# Altium PCB slave.PcbDoc (part 5 of 8)
Units mm, origin at the board's own origin, x right, y up, seen from the top; angles counter-clockwise.
Board outline 160 x 100 mm, 6 copper layers (Top, FUSED_VBAT-, Signals1, Signals2, SUPPLY, Bottom), stack 1.67 mm thick; 582 components, 375 nets, 1615 pads, 3043 vias.
Unrouted connection lines stored in the file: 1.
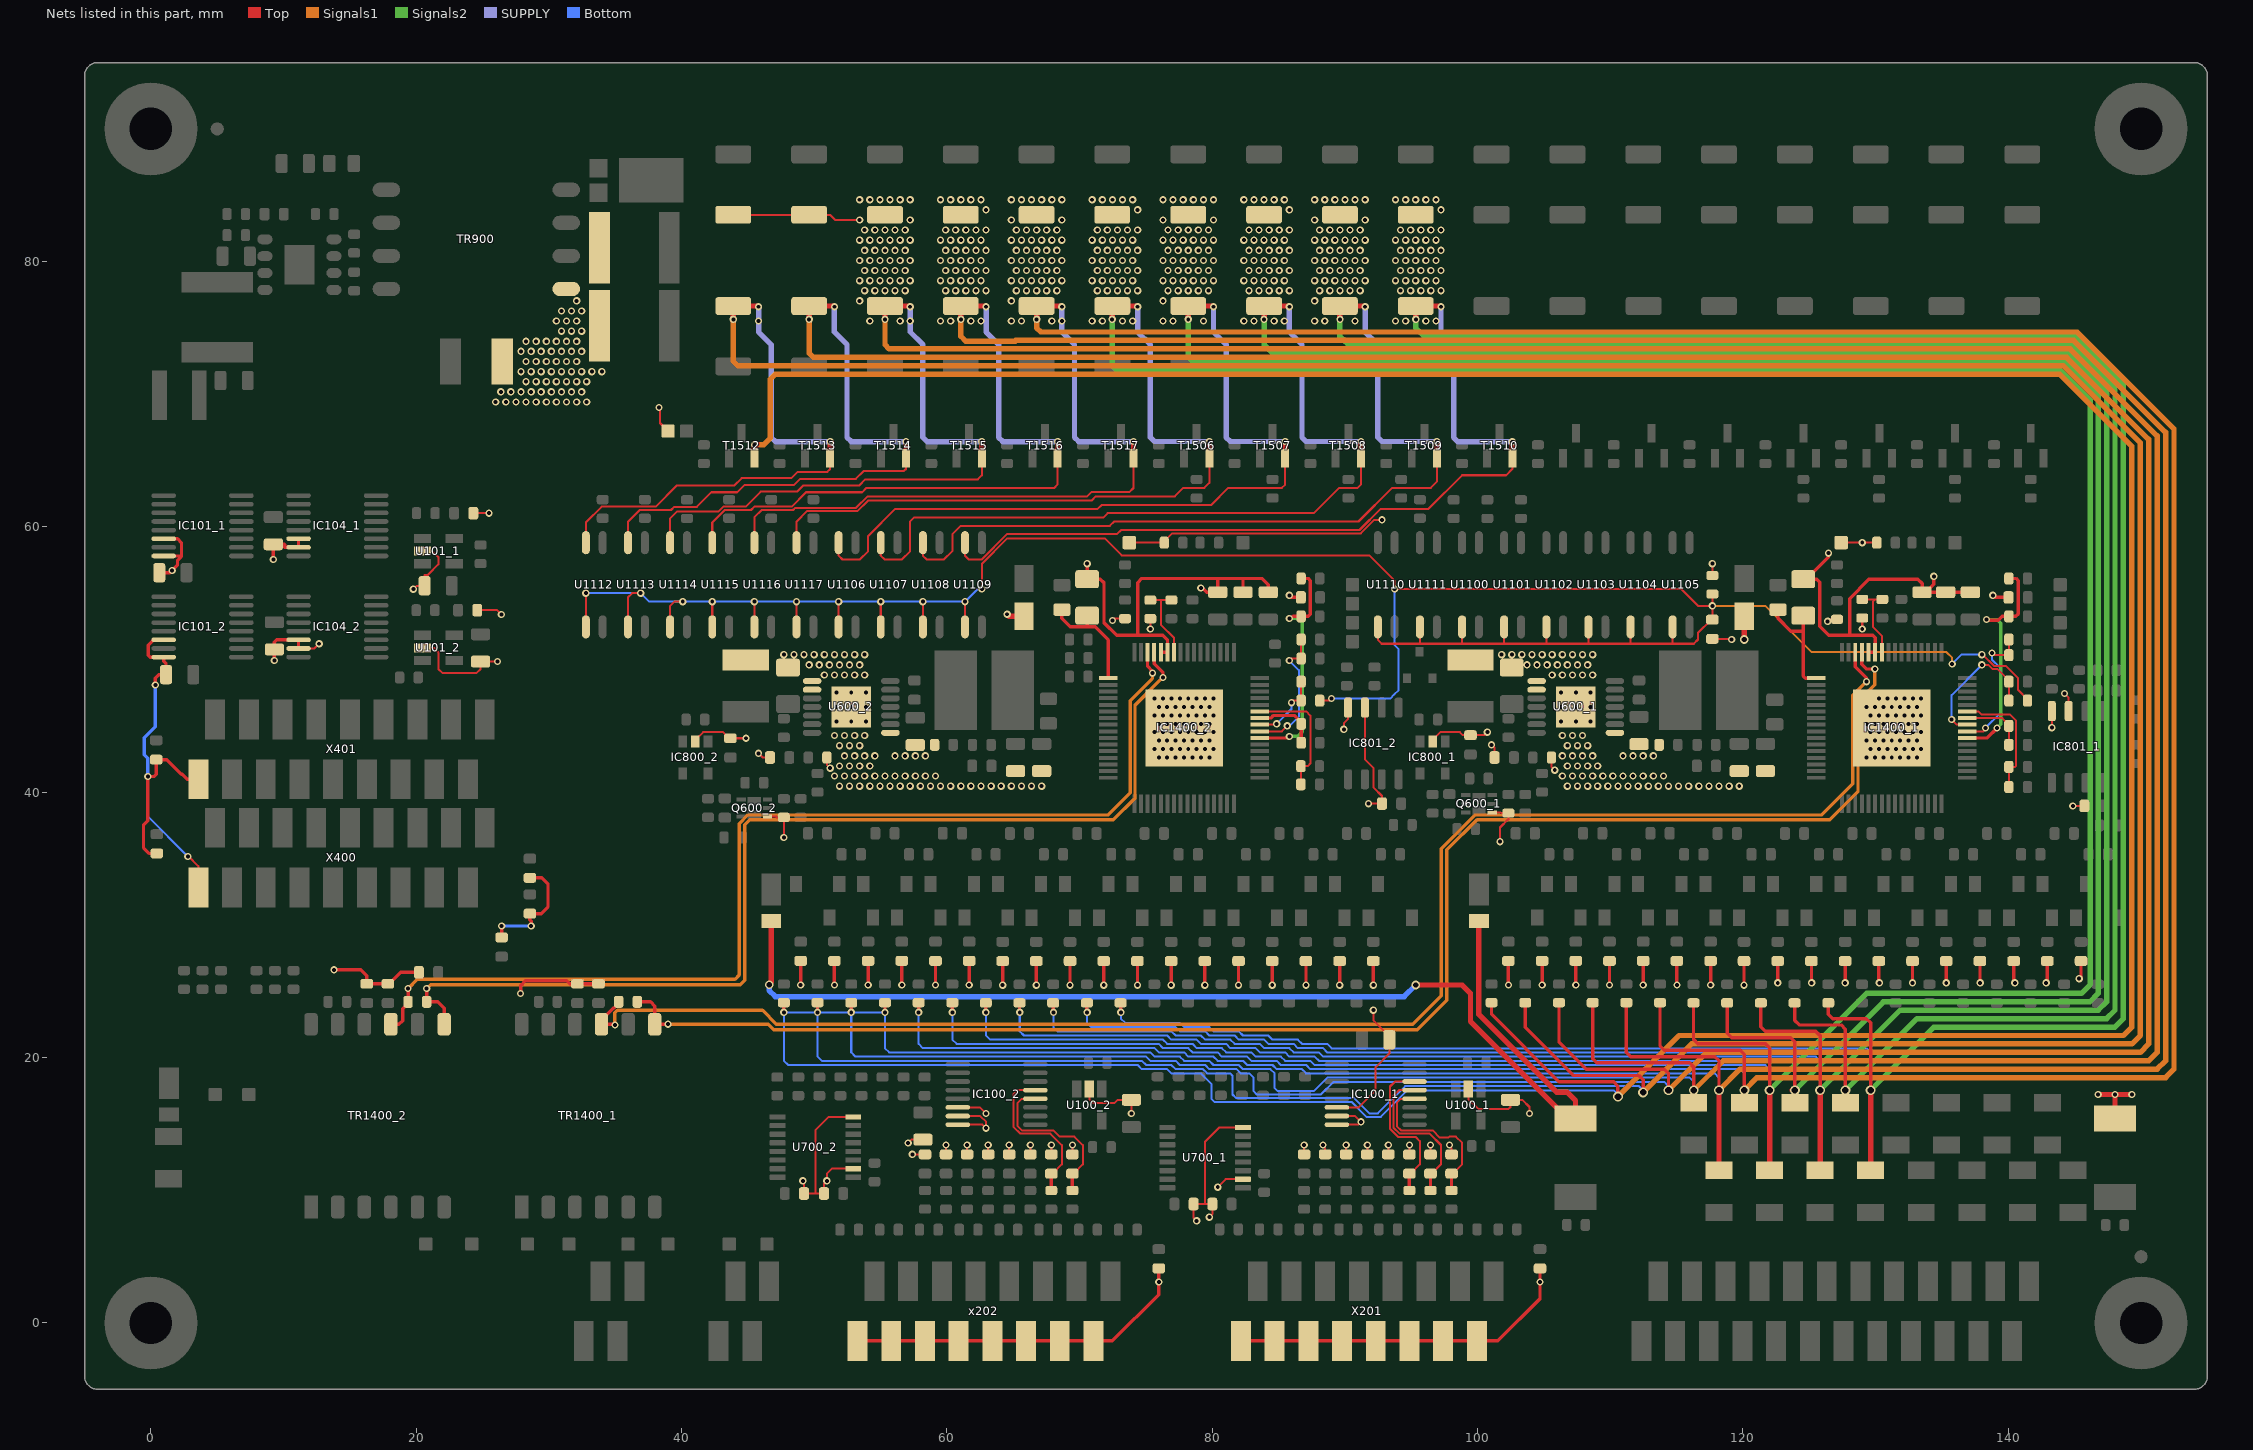
[diagram p8: the nets of this part, all layers, seen from the top]

## Via types
v1: diameter 0.55, hole 0.3, Top to Bottom, tented both sides, 2963 vias
v2: diameter 0.55, hole 0.3, Top to Bottom, 41 vias
v3: diameter 0.75, hole 0.5, Top to Bottom, tented both sides, 22 vias
v4: diameter 0.65, hole 0.4, Top to Bottom, tented both sides, 16 vias
v5: diameter 0.75, hole 0.5, Top to Bottom, 1 vias

## Nets (pads, with @x,y where several pads share a name; then routed paths per layer and width w, separated by ;. In a path a pad name is that pad's centre, name@x,y a point inside that pad or via, vN(x,y) a via of type N, cw(c..) or ccw(c..) an arc to the next point about the centre after c; other vN are vias at no path point) (continued)
FUSED_CELL.CELL_7+: F311.2 R1311_1.1 R1311_2.1 R1521.1 R1527.1 T1510.2 U1109.2 | length 266.8
  Top w0.152: U1109.2@61.363,58.81 61.363,57.833 61.657,57.54 62.614,57.54 64.519,59.445 72.811,59.445 73.129,59.762 91.098,59.762 92.685,61.35 96.301,61.35 98.841,63.89 102.145,63.89 102.616,64.361 T1510.2@102.616,65.162
  Top w0.254: R1311_2.1@73.091,24.125 73.091,23.428 v1(73.111,23.408) ; R1311_1.1@126.431,24.125 126.431,23.27 126.768,22.932 129.308,22.932 129.626,22.615 v3(129.626,17.535)
  Top w0.406: v1(95.341,75.637) 95.336,75.642 R1521.1@95.336,76.642 97.188,76.642 v1(97.241,76.59) ; T1510.2@102.616,65.162 v1(102.616,66.407) ; F311.2@129.626,11.505 v3(129.626,17.535)
  Signals2 w0.406: v1(95.341,75.637) 95.336,75.632 95.336,75.002 95.971,74.367 96.606,74.367 144.982,74.367 148.676,70.673 148.676,65.795 148.676,65.16 148.676,22.932 148.041,22.297 134.388,22.297 v3(129.626,17.535)
  SUPPLY w0.406: v1(97.241,76.59) 97.241,74.685 98.193,73.732 98.193,66.747 98.533,66.407 v1(102.616,66.407)
  Bottom w0.152: v1(73.111,23.408) 73.111,22.932 73.428,22.615 77.556,22.615 77.873,22.297 79.778,22.297 80.096,21.98 82.001,21.98 82.318,21.662 84.223,21.662 84.541,21.345 86.446,21.345 86.763,21.027 88.668,21.027 88.998,20.697 129.308,20.697 129.626,20.38 v3(129.626,17.535)
  other v1: 93.812,75.51 94.574,75.51 96.098,75.51 96.86,75.51 94.193,77.796 94.955,77.796 95.717,77.796 96.479,77.796 97.241,77.796 93.812,78.558 94.574,78.558 95.336,78.558 96.098,78.558 96.86,78.558 94.193,79.32 94.955,79.32 95.717,79.32 96.479,79.32 97.241,79.32 93.812,80.082 94.574,80.082 95.336,80.082 96.098,80.082 96.86,80.082 94.193,80.844 94.955,80.844 95.717,80.844 96.479,80.844 97.241,80.844 93.812,81.606 94.574,81.606 95.336,81.606 96.098,81.606 96.86,81.606 94.193,82.368 94.955,82.368 95.717,82.368 96.479,82.368 97.241,82.368 97.241,83.892 93.812,84.654 94.574,84.654 95.336,84.654 96.098,84.654 96.86,84.654
FUSED_CELL.CELL_8+: F310.2 R1310_1.1 R1310_2.1 R1520.1 R1526.1 T1509.2 U1108.2 | length 268
  Top w0.152: U1108.2@58.188,58.81 58.188,57.833 58.482,57.54 59.776,57.54 60.411,58.175 60.411,59.445 61.046,60.08 72.288,60.08 72.613,60.405 91.022,60.405 93.554,62.937 96.471,62.937 96.936,63.402 T1509.2@96.936,65.162
  Top w0.254: R1310_2.1@70.551,24.125 70.551,23.428 v1(70.571,23.408) ; R1310_1.1@123.891,24.125 123.891,22.793 124.228,22.456 127.403,22.456 127.721,22.138 v3(127.721,17.535)
  Top w0.406: v1(89.621,75.637) R1520.1@89.621,76.642 91.473,76.642 v1(91.526,76.59) ; v1(96.923,66.43) 96.936,66.43 T1509.2@96.936,65.162 ; F310.2@127.721,16.585 v3(127.721,17.535)
  Signals2 w0.406: v1(89.621,75.637) 89.621,74.367 89.938,74.05 90.256,73.732 144.719,73.732 148.041,70.41 148.041,65.16 148.041,23.567 147.406,22.932 133.118,22.932 v3(127.721,17.535)
  SUPPLY w0.406: v1(91.526,76.59) 91.526,74.685 92.478,73.732 92.478,66.747 92.796,66.43 v1(96.923,66.43)
  Bottom w0.152: v1(70.571,23.408) 70.571,22.615 70.888,22.297 77.238,22.297 77.556,21.98 79.461,21.98 79.778,21.662 81.683,21.662 82.001,21.345 83.906,21.345 84.223,21.027 86.128,21.027 86.446,20.71 88.351,20.71 88.681,20.38 127.403,20.38 127.721,20.062 v3(127.721,17.535)
  other v1: 87.716,75.51 88.478,75.51 90.764,75.51 87.716,77.034 88.097,77.796 88.859,77.796 89.621,77.796 90.383,77.796 91.145,77.796 87.716,78.558 88.478,78.558 89.24,78.558 90.002,78.558 90.764,78.558 91.526,78.558 88.097,79.32 88.859,79.32 89.621,79.32 90.383,79.32 91.145,79.32 87.716,80.082 88.478,80.082 89.24,80.082 90.002,80.082 90.764,80.082 91.526,80.082 88.097,80.844 88.859,80.844 89.621,80.844 90.383,80.844 91.145,80.844 87.716,81.606 88.478,81.606 89.24,81.606 90.002,81.606 90.764,81.606 91.526,81.606 88.097,82.368 88.859,82.368 89.621,82.368 90.383,82.368 91.145,82.368 87.716,83.13 91.526,83.13 87.716,84.654 88.478,84.654 89.24,84.654 90.002,84.654 90.764,84.654 91.526,84.654
FUSED_CELL.CELL_9+: F309.2 R1309_1.1 R1309_2.1 R1519.1 R1525.1 T1508.2 U1107.2 | length 278.7
  Top w0.152: U1107.2@55.013,58.81 55.013,57.833 55.307,57.54 56.601,57.54 57.236,58.175 57.236,60.41 57.541,60.715 71.806,60.715 72.123,61.032 87.651,61.032 89.556,62.937 90.956,62.937 91.206,63.187 T1508.2@91.206,65.162
  Top w0.254: R1309_2.1@68.011,24.125 68.011,23.428 v1(68.031,23.408) ; R1309_1.1@121.351,24.125 121.351,22.317 121.688,21.98 125.498,21.98 125.816,21.662 v3(125.816,17.535)
  Top w0.406: v1(83.906,75.637) R1519.1@83.906,76.642 85.758,76.642 v1(85.811,76.59) ; T1508.2@91.206,65.162 v1(91.206,66.43) ; F309.2@125.816,11.505 v3(125.816,17.535)
  Signals2 w0.406: v1(83.906,75.637) 83.906,73.732 84.541,73.097 85.493,73.097 144.456,73.097 147.406,70.147 147.406,65.16 147.406,24.202 146.771,23.567 131.848,23.567 v3(125.816,17.535)
  SUPPLY w0.406: v1(85.811,76.59) 85.811,74.685 86.763,73.732 86.763,66.747 87.081,66.43 v1(91.206,66.43)
  Bottom w0.152: v1(68.031,23.408) 68.031,22.297 68.348,21.98 76.921,21.98 77.238,21.662 79.143,21.662 79.461,21.345 81.366,21.345 81.683,21.027 83.588,21.027 83.906,20.71 85.811,20.71 86.128,20.392 88.033,20.392 88.363,20.062 125.498,20.062 125.816,19.745 v3(125.816,17.535)
  other v1: 82.382,75.51 83.144,75.51 84.668,75.51 85.43,75.51 82.763,77.796 83.525,77.796 84.287,77.796 85.049,77.796 85.811,77.796 82.382,78.558 83.144,78.558 83.906,78.558 84.668,78.558 85.43,78.558 82.763,79.32 83.525,79.32 84.287,79.32 85.049,79.32 85.811,79.32 82.382,80.082 83.144,80.082 83.906,80.082 84.668,80.082 85.43,80.082 82.763,80.844 83.525,80.844 84.287,80.844 85.049,80.844 85.811,80.844 82.382,81.606 83.144,81.606 83.906,81.606 84.668,81.606 85.43,81.606 82.763,82.368 83.525,82.368 84.287,82.368 85.049,82.368 85.811,82.368 85.811,83.892 82.382,84.654 83.144,84.654 83.906,84.654 84.668,84.654 85.43,84.654
FUSED_CELL.CELL_10+: F308.2 R1308_1.1 R1308_2.1 R1518.1 R1524.1 T1507.2 U1106.2 | length 278.4
  Top w0.152: U1106.2@51.838,58.81 51.838,57.833 52.132,57.54 53.426,57.54 54.061,58.175 54.061,59.31 56.101,61.35 71.361,61.35 71.656,61.644 79.918,61.644 81.211,62.937 85.241,62.937 85.491,63.187 T1507.2@85.491,65.162
  Top w0.254: R1308_2.1@65.471,24.125 65.471,23.428 v1(65.491,23.408) ; R1308_1.1@118.811,24.125 118.811,21.841 119.148,21.503 123.593,21.503 123.911,21.186 v3(123.911,17.535)
  Top w0.406: v1(78.191,75.637) R1518.1@78.191,76.642 80.043,76.642 v1(80.096,76.59) ; T1507.2@85.491,65.162 85.491,65.964 85.493,65.966 v1(85.493,66.43) ; F308.2@123.911,16.585 123.911,17.336 123.712,17.535 v3(123.911,17.535)
  Signals2 w0.406: v1(78.191,75.637) 78.191,72.78 78.508,72.462 144.193,72.462 146.771,69.884 146.771,65.229 146.771,24.837 146.136,24.202 130.578,24.202 v3(123.911,17.535)
  SUPPLY w0.406: v1(80.096,76.59) 80.096,74.685 81.048,73.732 81.048,66.747 81.366,66.43 v1(85.493,66.43)
  Bottom w0.152: v1(65.491,23.408) 65.491,21.98 65.808,21.662 76.603,21.662 76.921,21.345 78.826,21.345 79.143,21.027 81.048,21.027 81.366,20.71 83.271,20.71 83.588,20.392 85.493,20.392 85.811,20.075 87.716,20.075 88.046,19.745 123.593,19.745 123.911,19.427 v3(123.911,17.535)
  other v1: 76.286,75.51 77.048,75.51 79.334,75.51 76.286,77.034 76.667,77.796 77.429,77.796 78.191,77.796 78.953,77.796 79.715,77.796 76.286,78.558 77.048,78.558 77.81,78.558 78.572,78.558 79.334,78.558 80.096,78.558 76.667,79.32 77.429,79.32 78.191,79.32 78.953,79.32 79.715,79.32 76.286,80.082 77.048,80.082 77.81,80.082 78.572,80.082 79.334,80.082 80.096,80.082 76.667,80.844 77.429,80.844 78.191,80.844 78.953,80.844 79.715,80.844 76.286,81.606 77.048,81.606 77.81,81.606 78.572,81.606 79.334,81.606 80.096,81.606 76.667,82.368 77.429,82.368 78.191,82.368 78.953,82.368 79.715,82.368 76.286,83.13 80.096,83.13 76.286,84.654 77.048,84.654 77.81,84.654 78.572,84.654 79.334,84.654 80.096,84.654
FUSED_CELL.CELL_11+: F307.2 R1307_1.1 R1307_2.1 R1541.1 R1547.1 T1506.2 U1117.2 | length 286.9
  Top w0.152: U1117.2@48.663,58.81 48.663,60.397 49.444,61.177 53.254,61.177 54.061,61.985 70.906,61.985 71.223,62.302 77.173,62.302 77.808,62.937 79.396,62.937 79.776,63.317 T1506.2@79.776,65.162
  Top w0.254: v1@62.931,23.525 R1307_2.1@62.931,24.075 ; R1307_1.1@116.271,24.125 116.271,21.365 116.608,21.027 121.688,21.027 122.006,20.71 v3(122.006,17.535)
  Top w0.406: v1(72.456,75.637) 72.471,75.652 R1541.1@72.471,76.642 74.328,76.642 v1(74.381,76.59) ; T1506.2@79.776,65.162 79.776,66.427 v1(79.778,66.43) ; F307.2@122.006,11.25 F307.2@122.006,11.505 v3(122.006,17.535)
  Signals2 w0.406: v1(72.456,75.637) 72.456,72.165 72.793,71.827 143.93,71.827 146.182,69.575 146.182,65.16 146.182,25.519 145.501,24.837 129.308,24.837 v3(122.006,17.535)
  SUPPLY w0.406: v1(74.381,76.59) 74.381,74.685 75.333,73.732 75.333,66.747 75.651,66.43 v1(79.778,66.43)
  Bottom w0.152: v1@62.931,23.525 v1(62.931,23.408) 62.931,21.682 63.268,21.345 76.286,21.345 76.603,21.027 78.508,21.027 78.826,20.71 80.731,20.71 81.048,20.392 82.953,20.392 83.271,20.075 85.176,20.075 85.493,19.757 87.398,19.757 87.728,19.427 121.688,19.427 122.006,19.11 v3(122.006,17.535)
  other v1: 70.952,75.51 71.714,75.51 73.238,75.51 74,75.51 71.333,77.796 72.095,77.796 72.857,77.796 73.619,77.796 74.381,77.796 70.952,78.558 71.714,78.558 72.476,78.558 73.238,78.558 74,78.558 71.333,79.32 72.095,79.32 72.857,79.32 73.619,79.32 74.381,79.32 70.952,80.082 71.714,80.082 72.476,80.082 73.238,80.082 74,80.082 71.333,80.844 72.095,80.844 72.857,80.844 73.619,80.844 74.381,80.844 70.952,81.606 71.714,81.606 72.476,81.606 73.238,81.606 74,81.606 71.333,82.368 72.095,82.368 72.857,82.368 73.619,82.368 74.381,82.368 74.381,83.892 70.952,84.654 71.714,84.654 72.476,84.654 73.238,84.654 74,84.654
FUSED_CELL.CELL_12+: F306.2 R1318_1.1 R1318_2.1 R1540.1 R1546.1 T1517.2 U1116.2 | length 302.1
  Top w0.152: U1116.2@45.488,58.81 45.488,60.715 46.042,61.268 48.397,61.268 48.561,61.431 53.148,61.431 54.019,62.302 70.571,62.302 70.888,62.62 73.754,62.62 74.061,62.927 T1517.2@74.061,65.162
  Top w0.254: v1(60.411,23.408) R1318_2.1@60.411,24.137 ; R1318_1.1@113.751,24.202 R1318_1.1@113.751,24.137 113.751,20.868 114.068,20.551 119.783,20.551 120.101,20.233 v3(120.101,17.535)
  Top w0.406: v1(66.761,75.637) R1540.1@66.761,76.642 68.613,76.642 v1(68.666,76.59) ; T1517.2@74.061,65.162 v1(74.061,66.427) ; F306.2@120.101,16.33 F306.2@120.101,16.585 v3(120.101,17.535)
  Signals1 w0.406: v1(66.761,75.637) 66.761,75.002 67.078,74.685 145.183,74.685 152.486,67.382 152.486,64.207 152.486,19.122 151.851,18.487 121.053,18.487 v3(120.101,17.535)
  SUPPLY w0.406: v1(68.666,76.59) v1(68.666,75.51) 68.666,74.685 69.618,73.732 69.618,66.747 69.938,66.427 v1(74.061,66.427)
  Bottom w0.152: v1(60.411,23.408) 60.411,21.345 60.728,21.027 75.968,21.027 76.286,20.71 78.191,20.71 78.508,20.392 80.413,20.392 80.731,20.075 82.636,20.075 82.953,19.757 84.858,19.757 85.176,19.44 87.081,19.44 87.398,19.122 119.783,19.122 120.101,18.805 v3(120.101,17.535)
  other v1: 64.856,75.51 65.618,75.51 67.904,75.51 64.856,77.034 65.237,77.796 65.999,77.796 66.761,77.796 67.523,77.796 68.285,77.796 64.856,78.558 65.618,78.558 66.38,78.558 67.142,78.558 67.904,78.558 68.666,78.558 65.237,79.32 65.999,79.32 66.761,79.32 67.523,79.32 68.285,79.32 64.856,80.082 65.618,80.082 66.38,80.082 67.142,80.082 67.904,80.082 68.666,80.082 65.237,80.844 65.999,80.844 66.761,80.844 67.523,80.844 68.285,80.844 64.856,81.606 65.618,81.606 66.38,81.606 67.142,81.606 67.904,81.606 68.666,81.606 65.237,82.368 65.999,82.368 66.761,82.368 67.523,82.368 68.285,82.368 64.856,83.13 68.666,83.13 64.856,84.654 65.618,84.654 66.38,84.654 67.142,84.654 67.904,84.654 68.666,84.654
FUSED_CELL.CELL_13+: F305.2 R1317_1.1 R1317_2.1 R1539.1 R1545.1 T1516.2 U1115.2 | length 311.7
  Top w0.152: U1115.2@42.313,58.81 42.313,60.329 43.253,61.268 45.234,61.268 45.488,61.522 48.292,61.522 49.377,62.607 53.606,62.607 53.925,62.927 68.077,62.927 68.346,63.195 T1516.2@68.346,65.162
  Top w0.254: v1(57.871,23.408) R1317_2.1@57.871,24.137 ; R1317_1.1@111.211,24.087 111.211,20.392 111.528,20.075 117.878,20.075 118.196,19.757 v3(118.196,17.535)
  Top w0.406: v1(61.046,75.637) R1539.1@61.046,76.642 62.898,76.642 v1(62.951,76.59) ; T1516.2@68.346,65.162 v1(68.346,66.427) ; F305.2@118.196,11.25 F305.2@118.196,11.505 v3(118.196,17.535)
  Signals1 w0.406: v1(61.046,75.637) 61.046,74.367 61.41,74.003 65.138,74.003 65.184,74.05 144.92,74.05 151.851,67.119 151.851,64.207 151.851,19.757 151.216,19.122 119.783,19.122 v3(118.196,17.535)
  SUPPLY w0.406: v1(62.951,76.59) 62.951,74.685 63.903,73.732 63.903,66.747 64.223,66.427 v1(68.346,66.427)
  Bottom w0.152: v1(57.871,23.408) 57.871,21.027 58.188,20.71 75.651,20.71 75.968,20.392 77.873,20.392 78.191,20.075 80.096,20.075 80.413,19.757 82.318,19.757 82.636,19.44 84.541,19.44 84.858,19.122 86.763,19.122 87.081,18.805 117.878,18.805 118.196,18.487 v3(118.196,17.535)
  other v1: 59.522,75.51 60.284,75.51 61.808,75.51 62.57,75.51 59.903,77.796 60.665,77.796 61.427,77.796 62.189,77.796 62.951,77.796 59.522,78.558 60.284,78.558 61.046,78.558 61.808,78.558 62.57,78.558 59.903,79.32 60.665,79.32 61.427,79.32 62.189,79.32 62.951,79.32 59.522,80.082 60.284,80.082 61.046,80.082 61.808,80.082 62.57,80.082 59.903,80.844 60.665,80.844 61.427,80.844 62.189,80.844 62.951,80.844 59.522,81.606 60.284,81.606 61.046,81.606 61.808,81.606 62.57,81.606 59.903,82.368 60.665,82.368 61.427,82.368 62.189,82.368 62.951,82.368 62.951,83.892 59.522,84.654 60.284,84.654 61.046,84.654 61.808,84.654 62.57,84.654
FUSED_CELL.CELL_14+: F304.2 R1313_1.1 R1313_2.1 R1314_1.1 R1314_2.1 R1315_1.1 R1315_2.1 R1316_1.1 R1316_2.1 R1536.1 R1537.1 R1538.1 R1542.1 R1543.1 R1544.1 T1512.2 T1513.2 T1514.2 T1515.2 U1112.2 U1113.2 U1114.2 | length 1246
  Top w0.152: U1112.2@32.788,58.81 32.788,60.329 33.982,61.522 38.041,61.522 39.634,63.115 43.987,63.115 44.537,63.666 48.281,63.666 48.759,64.144 50.984,64.144 51.201,64.361 T1513.2@51.201,65.162 ; U1113.2@35.963,58.81 35.963,60.397 36.834,61.268 39.202,61.268 39.443,61.509 41.151,61.509 42.248,62.607 44.197,62.607 44.748,63.158 48.491,63.158 48.957,63.623 53.144,63.623 53.728,64.207 56.762,64.207 56.916,64.361 T1514.2@56.916,65.162 ; U1114.2@39.138,58.81 39.138,60.637 39.666,61.165 42.791,61.165 43.147,61.522 44.834,61.522 45.961,62.65 48.701,62.65 49.167,63.115 53.395,63.115 53.852,63.572 62.328,63.572 62.631,63.875 T1515.2@62.631,65.162 ; R1542.1@43.901,83.522 51.187,83.522 51.579,83.13 53.285,83.13 v1@53.34,83.185
  Top w0.254: v1(47.711,23.408) R1313_2.1@47.711,24.087 ; v1(50.251,23.408) R1314_2.1@50.251,24.087 ; v1(52.791,23.408) R1315_2.1@52.791,24.087 ; v1(55.331,23.408) R1316_2.1@55.331,24.137 ; R1313_1.1@101.051,24.087 101.051,23.25 106.131,18.17 110.258,18.17 110.576,17.852 v3(110.576,17.058) ; R1314_1.1@103.591,24.087 103.591,22.297 107.242,18.646 112.163,18.646 112.481,18.328 v3(112.481,17.376) ; R1315_1.1@106.131,24.087 106.131,21.186 108.195,19.122 114.068,19.122 114.386,18.805 v3(114.386,17.535) ; R1316_1.1@108.671,24.202 R1316_1.1@108.671,24.137 108.671,19.916 108.988,19.598 115.973,19.598 116.291,19.281 v3(116.291,17.535)
  Top w0.406: v1(43.901,75.637) R1536.1@43.901,76.642 45.753,76.642 v1(45.806,76.59) ; T1512.2@45.493,65.17 T1512.2@45.486,65.162 45.486,66.169 v1(45.493,66.177) ; v1(49.616,75.637) R1537.1@49.616,76.642 51.468,76.642 v1(51.521,76.59) ; T1513.2@51.201,65.162 v1(51.201,66.427) ; v1(55.331,75.637) R1538.1@55.331,76.642 57.183,76.642 v1(57.236,76.59) ; T1514.2@56.916,65.162 v1(56.916,66.427) ; T1515.2@62.631,65.162 v1(62.631,66.427) ; F304.2@116.291,16.33 F304.2@116.291,16.585 v3(116.291,17.535)
  Signals1 w0.406: v1(43.901,75.637) 43.901,72.462 44.218,72.145 144.131,72.145 149.946,66.33 149.946,64.207 149.946,21.662 149.311,21.027 116.132,21.027 v3(112.481,17.376) ; v1(45.493,66.177) 46.191,66.177 46.681,66.667 46.681,71.114 47.076,71.51 143.868,71.51 149.311,66.067 149.311,64.207 149.311,22.297 148.676,21.662 115.18,21.662 v3(110.576,17.058) ; v1(49.616,75.637) 49.616,73.097 49.933,72.78 144.394,72.78 150.581,66.593 150.581,64.207 150.581,21.027 149.946,20.392 117.243,20.392 v3(114.386,17.535) ; v1(55.331,75.637) 55.331,73.732 55.648,73.415 144.657,73.415 151.216,66.856 151.216,64.207 151.216,20.392 150.581,19.757 118.513,19.757 v3(116.291,17.535)
  SUPPLY w0.406: v1(45.806,76.59) v1(45.806,75.51) 45.806,74.685 46.758,73.732 46.758,66.747 47.078,66.427 v1(51.201,66.427) ; v1(51.521,76.59) 51.521,74.685 52.473,73.732 52.473,66.747 52.793,66.427 v1(56.916,66.427) ; v1(57.236,76.59) v1(57.236,75.51) 57.236,74.685 58.188,73.732 58.188,66.747 58.508,66.427 v1(62.631,66.427)
  Bottom w0.152: v1@50.249,23.406 50.247,23.408 v1(47.711,23.408) 47.711,19.757 48.028,19.44 74.381,19.44 74.698,19.122 76.603,19.122 76.921,18.805 79.143,18.805 79.937,18.011 79.937,16.887 80.161,16.664 90.492,16.664 91.621,15.534 92.701,15.534 94.701,17.535 95.336,17.535 110.258,17.535 110.576,17.217 v3(110.576,17.058) ; v1@52.784,23.408 v1(50.251,23.408) 50.251,20.075 50.568,19.757 74.698,19.757 75.016,19.44 76.921,19.44 77.238,19.122 79.302,19.122 79.62,18.805 81.344,18.805 81.525,18.624 81.525,17.216 81.779,16.962 90.67,16.962 91.843,15.788 92.478,15.788 94.542,17.852 95.018,17.852 112.163,17.852 112.481,17.535 v3(112.481,17.376) ; v1(55.331,23.408) 55.331,20.71 55.648,20.392 75.333,20.392 75.651,20.075 77.556,20.075 77.873,19.757 79.778,19.757 80.096,19.44 82.001,19.44 82.318,19.122 84.382,19.122 84.7,18.805 84.7,17.693 84.923,17.47 87.663,17.47 88.681,18.487 115.973,18.487 116.291,18.17 v3(116.291,17.535) ; v1@55.337,23.396 55.325,23.408 v1(52.791,23.408) 52.791,20.392 53.108,20.075 75.016,20.075 75.333,19.757 77.238,19.757 77.556,19.44 79.461,19.44 79.778,19.122 81.842,19.122 82.16,18.805 82.795,18.805 83.112,18.487 83.112,17.47 83.366,17.216 88.191,17.216 89.145,18.17 114.068,18.17 114.386,17.852 v3(114.386,17.535)
  other v1: 54.188,75.51 56.474,75.51 53.426,77.034 53.807,77.796 54.569,77.796 55.331,77.796 56.093,77.796 56.855,77.796 53.426,78.558 54.188,78.558 54.95,78.558 55.712,78.558 56.474,78.558 57.236,78.558 53.807,79.32 54.569,79.32 55.331,79.32 56.093,79.32 56.855,79.32 53.426,80.082 54.188,80.082 54.95,80.082 55.712,80.082 56.474,80.082 57.236,80.082 53.807,80.844 54.569,80.844 55.331,80.844 56.093,80.844 56.855,80.844 53.426,81.606 54.188,81.606 54.95,81.606 55.712,81.606 56.474,81.606 57.236,81.606 53.807,82.368 54.569,82.368 55.331,82.368 56.093,82.368 56.855,82.368 53.426,83.13 57.236,83.13 53.426,84.654 54.188,84.654 54.95,84.654 55.712,84.654 56.474,84.654 57.236,84.654
FUSED_VBAT+: D1400_1.1 D1400_2.1 F300.2 | length 90.4
  Top w0.406: v4(46.6,25.498) 46.758,25.657 D1400_2.1@46.758,30.297 ; v4(95.336,25.472) 98.828,25.472 99.463,24.837 99.463,22.715 106.786,15.392 F300.2@107.381,15.392 107.381,16.761 106.766,17.376 105.972,17.376 100.098,23.25 D1400_1.1@100.098,30.297
  Bottom w0.406: v4(46.6,25.498) 46.6,25.061 47.064,24.596 94.46,24.596 v4(95.336,25.472)
FUSED_VBAT-: C100_1.1 C100_2.1 C101_1.1 C101_2.1 C102_1.1 C102_2.1 C103_1.1 C103_2.1 C104_1.1 C104_2.1 C105_1.1 C105_2.1 C106_1.1 C106_2.1 C107_1.1 C107_2.1 C108_1.1 C108_2.1 C109_1.1 C109_2.1 C110_1.1 C110_2.1 C111_1.1 C111_2.1 C112_1.1 C112_2.1 C113_1.1 C113_2.1 C114_1.1 C114_2.1 C115_1.1 C115_2.1 C400.1 C401.1 C404.1 C405.1 C406.1 C407.1 C600_1.1 C600_2.1 C601_1.1 C601_2.1 C603_1.1 C603_2.1 C605_1.1 C605_2.1 C606_1.1 C606_2.1 C607_1.2 C607_2.2 C700_1.1 C700_2.1 C701_1.1 C701_2.1 C800_1.1 C800_2.1 C801_1.1 C801_2.1 C906.2 C907.1 C908.1 C1100.1 C1300_1.2 C1300_2.2 C1301_1.2 C1301_2.2 C1302_1.2 C1302_2.2 C1303_1.2 C1303_2.2 C1304_1.2 C1304_2.2 C1305_1.2 C1305_2.2 C1312_1.2 C1312_2.2 C1313_1.2 C1313_2.2 C1314_1.2 C1314_2.2 C1315_1.2 C1315_2.2 C1316_1.2 C1316_2.2 C1317_1.2 C1317_2.2 C1324_1.2 C1324_2.2 C1325_1.2 C1325_2.2 C1326_1.2 C1326_2.2 C1327_1.2 C1327_2.2 C1328_1.2 C1328_2.2 C1329_1.2 C1329_2.2 C1400_1.2 C1400_2.2 C1401_1.1 C1401_2.1 C1402_1.1 C1402_2.1 C1403_1.1 C1403_2.1 C1404_1.1 C1404_2.1 C1405_1.1 C1405_2.1 D1401_1.2 D1401_2.2 F320.2 IC100_1.14 IC100_1.15 IC100_1.16 IC100_2.14 IC100_2.15 IC100_2.16 IC101_1.14 IC101_1.16 IC101_2.14 IC101_2.16 IC104_1.14 IC104_1.15 IC104_2.14 IC104_2.15 IC800_1.2 IC800_2.2 IC801_1.3 IC801_1.4 IC801_2.3 IC801_2.4 IC1400_1.59 IC1400_1.60 IC1400_1.65 IC1400_2.59 IC1400_2.60 IC1400_2.65 Q600_1.1 Q600_2.1 R601_1.2 R601_2.2 R603_1.2 R603_2.2 R606_1.1 R606_2.1 R1118.2 R1400_1.1 R1400_2.1 R1403_1.1 R1403_2.1 R1406_1.1 R1406_2.1 TP903.1 TP1400_1.1 TP1400_2.1 TR900.8 U100_1.2 U100_2.2 U101_1.2 U101_2.2 U600_1.1 U600_1.2 U600_1.8 U600_1.15 U600_2.1 U600_2.2 U600_2.8 U600_2.15 U700_1.2 U700_1.8 U700_2.2 U700_2.8 X201.1 X201.3 X201.5 X201.7 X201.9 X201.11 X201.13 X201.15 x202.1 x202.3 x202.5 x202.7 x202.9 x202.11 x202.13 x202.15 X400.18 X401.18 | length 410.2
  Top w0.152: v2(2.785,35.156) 2.844,35.156 3.578,34.422 X400.18@3.578,32.82 ; IC104_2.15@11.16,50.834 12.334,50.834 v1(12.69,51.19) ; v1(19.783,55.305) 20.037,55.559 C104_1.1@20.631,55.559 20.631,56.385 20.888,56.385 21.676,57.173 21.676,57.726 21.227,58.175 U101_1.2@20.476,58.175 ; U101_2.2@20.476,50.872 21.358,50.872 21.676,50.555 21.676,49.285 21.993,48.967 24.533,48.967 24.851,49.285 C104_2.1@24.851,49.847 v1(26.121,49.847) ; C107_1.1@24.306,61.032 v1(25.486,61.032) ; C107_2.1@24.743,53.717 26.101,53.717 v1(26.418,53.4) ; v1@31.201,70.811 v1(31.328,70.938) ; v1@38.259,68.897 38.291,68.897 38.378,68.81 38.378,67.825 TP903.1@38.98,67.223 ; IC800_2.2@41.043,43.817 41.043,43.942 41.623,44.522 43.128,44.522 43.583,44.067 C800_2.1@43.683,44.067 v1(44.853,44.067) ; v1(45.806,42.935) 46.123,42.617 C607_2.2@46.668,42.617 ; Q600_2.1@46.483,38.157 47.109,38.157 47.159,38.107 R606_2.1@47.711,38.107 v1(47.711,36.585) ; v1(49.14,10.708) 49.23,10.798 C700_2.1@49.23,9.756 50.092,9.756 ; R601_2.2@50.951,42.617 50.951,42.066 v1(51.203,41.813) ; U700_2.2@52.942,11.623 51.325,11.623 50.955,11.253 v1(50.955,10.708) 50.736,10.49 C701_2.1@50.736,9.756 50.092,9.756 ; U700_2.8@52.942,15.523 51.097,15.523 50.092,14.518 50.092,9.756 ; v1(57.077,13.566) 57.322,13.811 C101_2.1@58.188,13.811 ; v1(57.395,12.703) C115_2.1@58.347,12.703 ; C114_2.1@59.935,12.703 v1(59.935,13.407) ; IC100_2.16@60.82,14.942 62.678,14.942 v1(62.943,14.677) 62.943,15.146 62.951,15.153 62.512,15.592 IC100_2.15@60.82,15.592 ; IC100_2.14@60.82,16.242 62.49,16.242 v1(62.943,15.788) ; C113_2.1@61.522,12.703 v1(61.522,13.407) ; C112_2.1@63.11,12.703 v1(63.11,13.407) ; C111_2.1@64.697,12.703 v1(64.697,13.407) ; C110_2.1@66.285,12.703 v1(66.285,13.407) ; C109_2.1@67.872,12.703 v1(67.872,13.407) ; C108_2.1@69.46,12.703 v1(69.46,13.407) ; U100_2.2@70.73,17.623 70.73,16.872 71.019,16.582 72.635,16.582 72.866,16.813 C103_2.1@73.905,16.813 v1(73.905,15.788) ; v1(72.476,52.936) 72.62,53.08 R1406_2.1@73.428,53.08 ; TP1400_2.1@73.746,58.81 R1403_2.1@76.38,58.81 76.38,58.91 76.978,59.508 91.203,59.508 92.219,60.524 v1(92.796,60.524) ; v1(75.333,52.301) R1400_2.1@75.333,52.98 ; v1(78.826,7.692) 78.598,7.92 C700_1.1@78.598,8.962 79.461,8.962 ; v1(79.778,7.973) 80.006,8.201 C701_1.1@80.006,8.962 79.461,8.962 ; v1(80.413,10.232) 81.011,10.83 U700_1.2@82.311,10.83 ; U700_1.8@82.311,14.73 80.518,14.73 79.461,13.672 79.461,8.962 ; C115_1.1@86.922,12.703 v1(86.922,13.407) ; v1(88.351,13.407) 88.351,13.339 88.51,13.18 C114_1.1@88.51,12.703 ; IC100_1.16@89.395,14.942 90.997,14.942 v1(91.208,15.153) 90.77,15.592 IC100_1.15@89.395,15.592 ; IC100_1.14@89.395,16.242 91.027,16.242 92.32,17.535 92.32,19.281 93.345,20.306 C101_1.1@93.345,21.345 93.345,21.62 92.141,22.823 v1(92.141,23.567) ; v1(89.918,44.735) 89.918,45.203 90.236,45.521 IC801_2.4@90.236,46.372 ; C113_1.1@90.097,12.703 v1(90.097,13.407) ; IC801_2.3@91.506,46.372 91.506,42.478 92.166,41.818 92.166,40.341 92.791,39.716 C801_2.1@92.791,39.14 v1(91.778,39.14) ; C112_1.1@91.685,12.703 v1(91.685,13.407) ; C111_1.1@93.272,12.703 v1(93.272,13.407) ; C110_1.1@94.86,12.703 v1(94.86,13.407) ; C109_1.1@96.447,12.703 v1(96.447,13.407) ; IC800_1.2@96.606,43.817 96.606,43.942 97.186,44.522 98.659,44.522 98.887,44.295 C801_1.1@99.463,44.295 100.506,44.295 v1(100.733,44.522) ; v1(97.876,13.407) 97.876,13.339 98.035,13.18 C108_1.1@98.035,12.703 ; U100_1.2@99.305,17.623 99.305,16.872 100.07,16.106 102.311,16.106 102.48,16.274 C103_1.1@102.48,16.813 103.369,16.813 103.908,16.274 v1(103.908,15.788) ; v1(101.051,43.57) 101.278,43.342 C607_1.2@101.278,42.617 ; Q600_1.1@101.093,38.474 101.719,38.474 101.769,38.425 R606_1.1@102.321,38.425 102.321,37.973 101.686,37.338 v1(101.686,36.267) ; R601_1.2@105.561,42.617 105.561,41.917 v1(105.813,41.665) ; C1100.1@117.693,51.558 119.097,51.558 v1(119.148,51.507) ; R1118.2@117.693,56.335 v1(117.693,57.222) ; v1(126.386,52.881) 126.534,53.03 R1406_1.1@127.086,53.03 ; TP1400_1.1@127.403,58.81 v1(128.991,58.81) R1403_1.1@130.146,58.81 ; v1(128.991,52.301) R1400_1.1@128.991,52.98 ; v1(143.278,44.867) IC801_1.4@143.278,46.111 ; v1(144.231,47.443) 144.548,47.126 IC801_1.3@144.548,46.111 ; v1(144.866,38.966) C800_1.1@145.728,38.966
  Top w0.254: v1(0.34,48.078) 0.34,48.605 0.595,48.86 C102_2.1@1.147,48.86 1.147,49.687 0.971,49.863 IC101_2.16@0.971,50.185 -0.056,50.185 -0.183,50.312 -0.183,51.081 0.221,51.485 IC101_2.14@0.971,51.485 ; C401.1@0.448,35.383 -0.142,35.383 -0.549,35.791 -0.549,37.537 -0.232,37.855 v2(-0.232,41.188) 0.245,41.188 0.403,41.347 C400.1@0.403,42.458 1.197,42.458 2.308,41.347 2.354,41.347 2.727,40.975 X401.18@3.578,40.975 ; C102_1.1@0.636,56.544 1.439,56.544 v1(1.61,56.714) 2.007,57.112 2.007,57.461 2.308,57.762 2.308,57.842 ; IC101_1.16@0.971,57.805 2.271,57.805 2.308,57.842 ; IC101_1.14@0.971,59.105 2.013,59.105 2.308,58.81 2.308,57.842 ; v1(9.23,57.54) C105_1.1@9.23,58.685 10.056,58.685 10.104,58.637 10.104,58.455 IC104_1.15@11.131,58.455 IC104_1.14@11.131,59.105 ; v1(9.311,49.92) C105_2.1@9.311,50.76 9.311,51.312 9.484,51.485 IC104_2.14@11.131,51.485 IC104_2.15@11.131,50.835 ; v1(13.802,26.615) 15.829,26.615 16.278,26.166 C1405_2.1@16.278,25.562 C1404_2.1@17.866,25.562 17.966,25.562 18.828,26.425 C407.1@20.206,26.425 ; C406.1@26.438,29.055 v2(26.438,29.917) ; v1(27.867,24.821) 27.867,25.413 28.231,25.777 31.362,25.777 31.577,25.562 C1405_1.1@32.153,25.562 C1404_1.1@33.741,25.562 ; C404.1@28.571,33.547 29.476,33.547 29.931,33.092 29.931,31.346 29.433,30.848 C405.1@28.571,30.848 28.571,30.372 28.661,30.282 v2@28.661,30.076 ; v1(48.981,25.472) C1324_2.2@48.981,27.147 ; v1(51.521,25.472) C1325_2.2@51.521,27.147 ; x202.1@53.267,-1.357 x202.3@55.807,-1.357 x202.5@58.347,-1.357 x202.7@60.887,-1.357 x202.9@63.427,-1.357 x202.11@65.967,-1.357 x202.13@68.507,-1.357 x202.15@71.047,-1.357 72.476,-1.357 75.968,2.136 v1(75.968,3.088) C100_2.1@75.968,4.11 ; v1(54.061,25.472) C1326_2.2@54.061,27.147 ; v1(56.601,25.472) C1327_2.2@56.601,27.147 ; v1(59.141,25.472) C1328_2.2@59.141,27.147 ; v1(61.681,25.472) C1329_2.2@61.681,27.147 ; v1(64.201,25.46) C1312_2.2@64.201,27.135 ; v1(66.741,25.46) C1313_2.2@66.741,27.135 ; v1(69.281,25.46) C1314_2.2@69.281,27.135 ; v1(70.571,57.222) C1400_2.2@70.571,56.057 71.572,56.057 71.841,55.789 71.841,52.777 72.793,51.825 74.381,51.825 ; v1(71.821,25.46) C1315_2.2@71.821,27.135 ; v1(74.361,25.46) C1316_2.2@74.361,27.135 ; IC1400_2.60@76.123,50.54 IC1400_2.59@76.623,50.54 ; IC1400_2.59@76.623,50.59 76.623,51.487 76.286,51.825 74.381,51.825 ; v1(76.901,25.46) C1317_2.2@76.901,27.135 ; v1(79.143,55.389) 79.27,55.389 79.587,55.072 C1403_2.1@80.413,55.072 80.413,56.111 ; v1(79.441,25.46) C1300_2.2@79.441,27.135 ; C1403_2.1@79.996,54.772 C1403_2.1@80.096,54.772 ; v1(81.981,25.46) C1301_2.2@81.981,27.135 ; X201.1@82.16,-1.357 X201.3@84.7,-1.357 X201.5@87.24,-1.357 X201.7@89.78,-1.357 X201.9@92.32,-1.357 X201.11@94.86,-1.357 X201.13@97.4,-1.357 X201.15@99.94,-1.357 101.527,-1.357 104.702,1.818 v1(104.702,3.088) C100_1.1@104.702,4.11 ; C1402_2.1@82.318,55.072 82.318,56.111 ; C1401_2.1@84.223,55.072 84.223,55.624 83.736,56.111 82.318,56.111 ; v1(84.521,25.46) C1302_2.2@84.521,27.135 ; v1(85.811,54.841) 85.97,54.682 C106_2.1@86.673,54.682 ; v1(87.061,25.46) C1303_2.2@87.061,27.135 ; v1(89.601,25.46) C1304_2.2@89.601,27.135 ; v1(92.141,25.46) C1305_2.2@92.141,27.135 ; v1@102.321,25.46 v1(102.321,25.472) C1324_1.2@102.321,27.147 ; v1@104.861,25.46 v1(104.861,25.472) C1325_1.2@104.861,27.147 ; v1@107.401,25.46 v1(107.401,25.472) C1326_1.2@107.401,27.147 ; v1@109.941,25.46 v1(109.941,25.472) C1327_1.2@109.941,27.147 ; v1@112.481,25.46 v1(112.481,25.472) C1328_1.2@112.481,27.147 ; v1@115.021,25.46 v1(115.021,25.472) C1329_1.2@115.021,27.147 ; v1@117.561,25.46 v1(117.561,25.472) C1312_1.2@117.561,27.147 ; v1(120.081,25.46) C1313_1.2@120.081,27.135 ; v1(122.621,25.631) C1314_1.2@122.621,27.135 ; C1400_1.2@124.546,56.057 C1400_1.2@124.771,56.057 ; C1315_1.2@125.161,27.275 125.161,25.651 v1(125.181,25.631) ; v1(126.451,58.016) 126.451,57.737 C1400_1.2@124.771,56.057 ; v1(127.701,25.631) C1316_1.2@127.701,27.135 ; IC1400_1.60@129.463,50.54 IC1400_1.59@129.963,50.54 ; IC1400_1.59@129.963,50.59 129.963,51.646 129.785,51.825 128.038,51.825 ; C1317_1.2@130.241,27.275 130.241,25.663 v1(130.273,25.631) ; v1(132.781,25.631) C1300_1.2@132.781,27.135 ; v1(134.388,56.27) 134.388,55.686 C1403_1.1@133.774,55.072 ; v1(135.321,25.631) C1301_1.2@135.321,27.135 ; C1401_1.1@137.136,55.072 C1402_1.1@135.277,55.072 C1403_1.1@133.774,55.072 ; C1302_1.2@137.861,27.275 137.861,25.651 v1(137.881,25.631) ; v1(138.833,54.841) 138.992,54.682 C106_1.1@140.013,54.682 ; C1303_1.2@140.401,27.275 140.401,25.718 v1(140.488,25.631) ; v1(142.853,25.631) 142.941,25.718 C1304_1.2@142.941,27.275 ; v1(145.342,25.948) 145.481,26.087 C1305_1.2@145.481,27.275 ; 74.381,51.825 74.381,55.793 74.698,56.111 80.413,56.111 ; 80.413,56.111 82.318,56.111 ; C1400_1.2@124.771,56.057 125.547,56.057 125.781,55.824 125.781,52.495 126.451,51.825 128.038,51.825 ; 128.038,51.825 128.038,54.598 129.49,56.049 133.18,56.049 133.499,55.73 C1403_1.1@133.499,55.072 C1403_1.1@133.774,55.072
  Top w0.406: v1(64.538,53.412) 64.693,53.257 D1401_2.2@65.808,53.257 ; v4(120.101,51.507) D1401_1.2@120.101,53.157 ; v1(146.771,17.217) v1(148.041,17.217) ; F320.2@147.446,15.405 F320.2@148.041,15.405 ; F320.2@148.636,15.405 F320.2@148.041,15.405 ; v1(149.311,17.217) v1(148.041,17.217) ; F320.2@148.041,15.405 v1(148.041,17.217)
  Bottom w0.152: v2(-0.232,41.188) -0.232,38.172 v2(2.785,35.156)
  Bottom w0.254: v2(-0.232,41.188) -0.232,42.575 -0.486,42.83 -0.486,44.109 0.34,44.935 v1(0.34,48.078) ; v2@26.597,29.917 v2(28.661,29.917)
  other v1: 51.902,40.458 52.664,40.458 53.426,40.458 54.188,40.458 54.95,40.458 55.712,40.458 56.474,40.458 57.236,40.458 57.998,40.458 58.76,40.458 59.522,40.458 60.284,40.458 61.046,40.458 61.808,40.458 62.57,40.458 63.332,40.458 64.094,40.458 64.856,40.458 65.618,40.458 66.38,40.458 67.142,40.458 106.766,40.458 107.528,40.458 108.29,40.458 109.052,40.458 109.814,40.458 110.576,40.458 111.338,40.458 112.1,40.458 112.862,40.458 113.624,40.458 114.386,40.458 115.148,40.458 115.91,40.458 116.672,40.458 117.434,40.458 118.196,40.458 118.958,40.458 119.72,40.458 51.521,41.22 52.283,41.22 53.045,41.22 53.807,41.22 54.569,41.22 55.331,41.22 56.093,41.22 56.855,41.22 57.617,41.22 58.379,41.22 59.141,41.22 106.385,41.22 107.147,41.22 107.909,41.22 108.671,41.22 109.433,41.22 110.195,41.22 110.957,41.22 111.719,41.22 112.481,41.22 113.243,41.22 114.005,41.22 51.902,41.982 52.664,41.982 53.426,41.982 54.188,41.982 106.766,41.982 107.528,41.982 108.29,41.982 109.052,41.982 75.968,42.617 76.603,42.617 77.238,42.617 77.873,42.617 78.508,42.617 79.143,42.617 79.778,42.617 129.308,42.617 129.943,42.617 130.578,42.617 131.213,42.617 131.848,42.617 132.483,42.617 133.118,42.617 52.283,42.744 53.045,42.744 53.807,42.744 54.569,42.744 56.093,42.744 56.855,42.744 57.617,42.744 58.379,42.744 106.385,42.744 107.147,42.744 107.909,42.744 108.671,42.744 110.957,42.744 111.719,42.744 112.481,42.744 113.243,42.744 75.651,43.252 76.286,43.252 76.921,43.252 77.556,43.252 78.191,43.252 78.826,43.252 79.461,43.252 80.096,43.252 129.626,43.252 130.261,43.252 130.896,43.252 131.531,43.252 132.166,43.252 132.801,43.252 133.436,43.252 51.902,43.506 52.664,43.506 53.426,43.506 106.766,43.506 107.528,43.506 108.29,43.506 75.968,43.887 76.603,43.887 77.238,43.887 77.873,43.887 78.508,43.887 79.143,43.887 79.778,43.887 129.308,43.887 129.943,43.887 130.578,43.887 131.213,43.887 131.848,43.887 132.483,43.887 133.118,43.887 51.521,44.268 52.283,44.268 53.045,44.268 53.807,44.268 106.385,44.268 107.147,44.268 107.909,44.268 75.651,44.522 76.286,44.522 76.921,44.522 77.556,44.522 78.191,44.522 78.826,44.522 79.461,44.522 80.096,44.522 129.626,44.522 130.261,44.522 130.896,44.522 131.531,44.522 132.166,44.522 132.801,44.522 133.436,44.522 75.968,45.157 76.603,45.157 77.238,45.157 77.873,45.157 78.508,45.157 79.143,45.157 79.778,45.157 129.308,45.157 129.943,45.157 130.578,45.157 131.213,45.157 131.848,45.157 132.483,45.157 133.118,45.157 51.691,45.327 52.791,45.327 53.891,45.327 106.301,45.327 107.401,45.327 108.501,45.327 75.651,45.792 76.286,45.792 76.921,45.792 77.556,45.792 78.191,45.792 78.826,45.792 79.461,45.792 80.096,45.792 129.626,45.792 130.261,45.792 130.896,45.792 131.531,45.792 132.166,45.792 132.801,45.792 133.436,45.792 51.691,46.427 52.791,46.427 53.891,46.427 75.968,46.427 76.603,46.427 77.238,46.427 77.873,46.427 78.508,46.427 79.143,46.427 79.778,46.427 106.301,46.427 107.401,46.427 108.501,46.427 129.308,46.427 129.943,46.427 130.578,46.427 131.213,46.427 131.848,46.427 132.483,46.427 133.118,46.427 75.651,47.062 76.286,47.062 76.921,47.062 77.556,47.062 78.191,47.062 78.826,47.062 79.461,47.062 80.096,47.062 130.261,47.062 130.896,47.062 131.531,47.062 132.166,47.062 132.801,47.062 133.436,47.062 51.691,47.527 52.791,47.527 53.891,47.527 106.301,47.527 107.401,47.527 108.501,47.527 50.759,48.84 51.521,48.84 52.283,48.84 53.045,48.84 53.807,48.84 105.623,48.84 106.385,48.84 107.147,48.84 107.909,48.84 108.671,48.84 49.616,49.602 50.378,49.602 51.14,49.602 51.902,49.602 52.664,49.602 53.426,49.602 103.718,49.602 104.48,49.602 105.242,49.602 106.004,49.602 106.766,49.602 107.528,49.602 108.29,49.602 47.711,50.364 48.473,50.364 49.235,50.364 49.997,50.364 50.759,50.364 51.521,50.364 52.283,50.364 53.045,50.364 53.807,50.364 101.813,50.364 102.575,50.364 103.337,50.364 104.099,50.364 104.861,50.364 105.623,50.364 106.385,50.364 107.147,50.364 107.909,50.364 108.671,50.364 38.303,68.994 25.994,69.414 26.756,69.414 27.518,69.414 28.28,69.414 29.042,69.414 29.804,69.414 30.566,69.414 31.328,69.414 32.09,69.414 32.852,69.414 26.375,70.176 27.137,70.176 27.899,70.176 28.661,70.176 29.423,70.176 30.185,70.176 30.947,70.176 31.709,70.176 32.471,70.176 28.28,70.938 29.042,70.938 29.804,70.938 30.566,70.938 32.09,70.938 32.852,70.938 27.899,71.7 28.661,71.7 29.423,71.7 30.185,71.7 30.947,71.7 31.709,71.7 32.471,71.7 33.233,71.7 33.995,71.7 28.28,72.462 29.042,72.462 29.804,72.462 30.566,72.462 31.328,72.462 32.09,72.462 27.899,73.224 28.661,73.224 29.423,73.224 30.185,73.224 30.947,73.224 31.709,73.224 32.471,73.224 28.28,73.986 29.042,73.986 29.804,73.986 30.566,73.986 31.328,73.986 32.09,73.986 30.947,74.748 31.709,74.748 32.471,74.748 30.566,75.51 31.328,75.51 32.09,75.51 30.947,76.272 31.709,76.272 32.471,76.272 32.09,77.034
GLOBAL-BAL-FB: C1100.2 R1118.1 R1413_1.1 R1413_2.1 U1100.3 U1101.3 U1102.3 U1103.3 U1104.3 U1105.3 U1106.3 U1107.3 U1108.3 U1109.3 U1110.3 U1111.3 U1112.3 U1113.3 U1114.3 U1115.3 U1116.3 U1117.3 | length 192.9
  Top w0.152: U1112.3@32.788,52.46 v1(32.788,55) ; U1113.3@35.963,52.46 35.963,54.682 36.281,55 v1(36.916,55) ; U1114.3@39.138,52.46 39.138,54.047 39.456,54.365 v1(40.091,54.365) ; U1115.3@42.313,52.46 v1(42.313,54.365) ; U1116.3@45.488,52.46 v1(45.488,54.365) ; U1117.3@48.663,52.46 v1(48.663,54.365) ; U1106.3@51.838,52.46 v1(51.838,54.365) ; U1107.3@55.013,52.46 v1(55.013,54.365) ; U1108.3@58.188,52.46 v1(58.188,54.365) ; U1109.3@61.363,52.46 v1(61.363,54.365) ; v1(62.633,55.317) 62.633,57.2 64.561,59.127 71.908,59.127 73.178,57.857 91.843,57.857 93.748,55.952 v1(93.748,55.317) 115.338,55.317 116.608,54.047 v1(117.693,54.047) ; R1413_2.1@88.148,46.903 88.827,46.903 v1(88.986,47.062) ; U1110.3@92.478,52.46 92.478,51.483 92.772,51.19 95.653,51.19 ; U1111.3@95.653,52.46 95.653,51.19 ; U1100.3@98.828,52.46 98.828,51.19 ; U1101.3@102.003,52.46 102.003,51.19 ; U1102.3@105.178,52.46 105.178,51.19 ; U1103.3@108.353,52.46 108.353,51.19 ; U1104.3@111.528,52.46 111.528,51.19 ; U1105.3@114.703,52.46 114.703,51.19 ; R1118.1@117.693,54.935 v1(117.693,54.047) ; v1(138.008,50.364) 138.081,50.364 138.921,49.524 139.795,49.524 140.738,48.581 140.738,47.703 141.438,47.003 R1413_1.1@141.438,46.903 ; 95.653,51.19 98.828,51.19 ; 98.828,51.19 102.003,51.19 ; 102.003,51.19 105.178,51.19 ; 105.178,51.19 108.353,51.19 ; 108.353,51.19 111.528,51.19 ; 111.528,51.19 114.703,51.19 ; 114.703,51.19 116.291,51.19 116.608,51.507 116.608,52.023 117.593,53.008 C1100.2@117.693,53.008 v1(117.693,54.047)
  Signals1 w0.152: v1(117.693,54.047) 121.688,54.047 125.181,50.555 135.341,50.555 135.771,50.125 v1(135.771,49.67)
  Bottom w0.152: v1(32.788,55) v1(36.916,55) 37.551,54.365 v1(40.091,54.365) v1(42.313,54.365) v1(45.488,54.365) v1(48.663,54.365) v1(51.838,54.365) v1(55.013,54.365) v1(58.188,54.365) v1(61.363,54.365) 62.316,55.317 v1(62.633,55.317) ; v1(88.986,47.062) 93.41,47.05 93.728,47.367 94.045,47.684 94.045,50.784 93.748,51.081 v1(93.748,55.317) ; v1(135.771,49.67) 136.465,50.364 137.972,50.364 v1@137.995,50.386
GPIO1_1: IC1400_1.39 R1408_1.2 R1409_1.2 | length 17.7
  Top w0.254: IC1400_1.39@136.913,44.09 138.401,44.09 v1(139.151,44.84) ; v1(138.357,53.022) 138.414,52.966 139.246,52.966 139.533,53.253 R1409_1.2@140.038,53.253 140.56,53.253 140.738,53.431 140.738,55.952 140.58,56.111 R1408_1.2@140.038,56.111
  Signals2 w0.254: v1(138.357,53.022) 138.414,52.966 139.216,52.966 139.439,52.743 139.439,45.127 v1(139.151,44.84)
GPIO1_2: IC1400_2.39 R1408_2.2 R1409_2.2 | length 17.6
  Top w0.254: IC1400_2.39@83.623,44.09 85.696,44.09 v1(85.811,44.205) ; v1(85.811,53.095) 85.877,53.16 86.101,53.253 R1409_2.2@86.648,53.253 ; R1409_2.2@86.698,53.253 87.24,53.253 87.398,53.412 87.398,55.952 87.24,56.111 R1408_2.2@86.698,56.111
  Signals2 w0.254: v1(85.811,44.205) 86.446,44.205 86.778,44.537 86.778,52.762 86.446,53.095 v1(85.811,53.095)
GPIO2_1: IC1400_1.40 R1410_1.2 R1411_1.2 | length 10.3
  Top w0.152: IC1400_1.40@136.963,44.59 138.131,44.59 138.275,44.733 v1(138.275,44.839) ; v1(138.77,50.491) 138.929,50.332 R1411_1.2@140.038,50.332 R1410_1.2@140.038,51.507
  Bottom w0.152: v1(138.275,44.839) 139.388,45.952 139.388,49.365 138.77,49.983 138.77,50.473 v1@138.774,50.478
GPIO2_2: IC1400_2.40 R1410_2.2 R1411_2.2 | length 10.3
  Top w0.152: IC1400_2.40@83.573,44.59 85.243,44.59 v1(85.652,44.998) ; v1(85.811,49.92) 85.97,50.078 R1411_2.2@86.648,50.078 ; R1411_2.2@86.698,50.078 R1410_2.2@86.698,51.507
  Bottom w0.152: v1(85.652,44.998) 85.834,44.998 86.524,45.688 86.524,49.206 v1(85.811,49.92)
GPIO3_1: IC1400_1.41 R1412_1.2 R1413_1.2 | length 10.5
  Top w0.152: v1(135.727,45.475) 136.112,45.09 IC1400_1.41@136.913,45.09 ; v1(138.008,49.602) 138.484,49.602 138.816,49.27 139.2,49.27 140.038,48.432 R1412_1.2@140.038,48.332 R1413_1.2@140.038,46.903
  Bottom w0.152: v1(135.727,45.475) 135.727,47.321 137.991,49.586 v1@138.009,49.586
GPIO3_2: IC1400_2.41 R1412_2.2 R1413_2.2 | length 5.6
  Top w0.152: IC1400_2.41@83.623,45.09 84.791,45.09 v1(84.858,45.157) ; v1(85.97,46.745) 85.97,46.903 R1413_2.2@86.648,46.903 ; R1413_2.2@86.698,46.903 R1412_2.2@86.698,48.332
  Bottom w0.152: v1(84.858,45.157) 85.97,46.268 v1(85.97,46.745)
GPIO4_1: IC1400_1.42 R1414_1.2 R1415_1.2 | length 4.8
  Top w0.152: IC1400_1.42@136.963,45.59 139.547,45.59 140.038,45.098 R1414_1.2@140.038,44.998 R1415_1.2@140.038,43.57
GPIO4_2: IC1400_2.42 R1414_2.2 R1415_2.2 | length 5
  Top w0.254: IC1400_2.42@83.573,45.59 84.421,45.59 84.616,45.785 86.171,45.785 86.698,45.257 R1414_2.2@86.698,45.157 R1415_2.2@86.698,43.728 ; IC1400_2.42@83.623,45.59 IC1400_2.42@83.637,45.604
GPIO5_1: IC1400_1.43 R1416_1.2 R1417_1.2 | length 9.4
  Top w0.152: IC1400_1.43@136.963,46.09 137.742,46.09 137.988,45.844 140.142,45.844 140.566,45.419 140.566,41.969 140.505,41.907 R1416_1.2@140.038,41.907 R1417_1.2@140.038,40.395
GPIO5_2: IC1400_2.43 R1416_2.2 R1417_2.2 | length 9.7
  Top w0.152: IC1400_2.43@83.623,46.09 87.081,46.09 87.398,45.772 87.398,42.161 87.199,41.962 R1416_2.2@86.678,41.962 R1417_2.2@86.678,40.597 ; R1417_2.2@86.648,40.553 R1417_2.2@86.648,40.597
ICMP_1: IC1400_1.58 R1400_1.2 R1402_1.1 | length 5.8
  Top w0.152: R1400_1.2@128.991,54.53 129.95,54.53 ; IC1400_1.58@130.463,50.59 130.463,51.781 129.785,52.46 129.785,54.364 129.95,54.53 ; R1402_1.1@130.502,54.53 129.95,54.53
ICMP_2: IC1400_2.58 R1400_2.2 R1402_2.1 | length 5.9
  Top w0.152: R1400_2.2@75.333,54.48 76.127,54.48 ; R1402_2.1@76.921,54.48 76.127,54.48 ; IC1400_2.58@77.123,50.59 77.123,51.622 76.127,52.618 76.127,54.48
IN_N1_1: IC1400_1.61 R1405_1.2 TR1400_1.7 | length 119.7
  Top w0.254: R1405_1.2@36.663,24.102 R1405_1.2@36.663,24.202 37.663,24.202 37.98,23.885 TR1400_1.7@37.98,22.509 38.975,22.509 v1(38.98,22.513) ; IC1400_1.61@128.963,50.59 128.963,49.651 129.329,49.285 v1(129.943,49.285)
  Signals1 w0.254: v1(38.98,22.513) 46.542,22.513 46.949,22.107 95.463,22.107 97.678,24.322 97.678,35.655 99.954,37.931 126.527,37.931 128.673,40.077 128.673,46.841 129.943,48.111 v1(129.943,49.285)
IN_N1_2: IC1400_2.61 R1405_2.2 TR1400_2.7 | length 82.1
  Top w0.254: v1(20.788,25.204) R1405_2.2@20.788,24.202 21.619,24.202 22.105,23.716 TR1400_2.7@22.105,22.509 ; IC1400_2.61@75.623,50.59 75.623,49.681 75.732,49.572 75.743,49.572 76.286,49.029 v1(76.286,48.65)
  Signals1 w0.254: v1(20.788,25.204) 21.082,25.498 24.375,25.498 44.44,25.498 44.757,25.815 44.757,37.537 45.151,37.931 72.552,37.931 74.178,39.556 74.178,46.541 v1(76.286,48.65)
IN_P1_1: IC1400_1.62 R1405_1.1 TR1400_1.9 | length 122.7
  Top w0.254: v1(34.977,22.456) 34.923,22.509 TR1400_1.9@33.967,22.509 33.967,22.858 34.84,23.732 34.893,23.732 35.263,24.102 R1405_1.1@35.263,24.202 ; IC1400_1.62@128.463,50.59 128.463,49.464 129.308,48.619 v1(129.308,48.332)
  Signals1 w0.254: v1(34.977,22.456) 34.977,23.364 35.167,23.555 46.103,23.555 47.145,22.513 95.119,22.513 97.272,24.665 97.272,35.752 99.806,38.286 125.93,38.286 128.271,40.627 128.271,47.295 v1(129.308,48.332)
IN_P1_2: IC1400_2.62 R1405_2.1 TR1400_2.9 | length 82.3
  Top w0.254: TR1400_2.9@18.092,22.509 18.701,22.509 18.977,22.785 18.977,23.691 19.388,24.102 R1405_2.1@19.388,24.202 v1(19.388,25.204) ; IC1400_2.62@75.123,50.59 75.123,49.495 75.492,49.126 v1(75.492,48.967)
  Signals1 w0.254: v1(19.388,25.204) 20.088,25.904 44.033,25.904 44.351,26.222 44.351,37.634 45.003,38.286 72.159,38.286 73.822,39.95 73.822,46.896 75.492,48.566 v1(75.492,48.967)
LTC-V+_1: C1400_1.1 IC1400_1.1 R1401_1.2 | length 8.5
  Top w0.254: R1401_1.2@122.641,53.757 122.641,53.095 123.593,52.142 124.546,52.142 ; C1400_1.1@124.546,53.307 124.546,52.142 ; IC1400_1.1@125.513,48.59 124.712,48.59 124.546,48.756 124.546,52.142
LTC-V+_2: C1400_2.1 IC1400_2.1 R1401_2.2 | length 8.6
  Top w0.254: R1401_2.2@68.666,53.757 68.666,53.095 69.301,52.46 70.571,52.46 ; C1400_2.1@70.571,53.307 70.571,52.46 ; IC1400_2.1@72.173,48.59 72.173,51.475 71.189,52.46 70.571,52.46
NetC108_1_2: C108_1.2 IC100_1.4 R112_1.1 | length 12.7
  Top w0.152: IC100_1.4@95.245,16.892 94.218,16.892 93.907,16.581 93.907,14.836 94.225,14.518 96.606,14.518 97.16,13.964 97.788,13.964 97.866,14.042 98.352,14.042 98.828,13.566 98.828,11.947 98.135,11.253 C108_1.2@98.035,11.253
  Top w0.254: R112_1.1@98.035,9.98 C108_1.2@98.035,11.253
NetC108_2_2: C108_2.2 IC100_2.4 R112_2.1 | length 12.5
  Top w0.152: IC100_2.4@66.67,16.892 65.642,16.892 65.332,16.582 65.332,14.836 65.65,14.518 68.031,14.518 68.507,14.042 69.609,14.042 70.253,13.397 70.253,11.947 69.56,11.253 C108_2.2@69.46,11.253
  Top w0.254: R112_2.1@69.46,9.98 C108_2.2@69.46,11.253
NetC109_1_2: C109_1.2 IC100_1.5 R113_1.1 | length 12.1
  Top w0.152: IC100_1.5@95.245,17.542 94.073,17.542 93.653,17.122 93.653,14.731 94.119,14.264 96.384,14.264 97.241,13.407 97.241,11.947 96.547,11.253 C109_1.2@96.447,11.253
  Top w0.254: R113_1.1@96.447,9.98 C109_1.2@96.447,11.253
NetC109_2_2: C109_2.2 IC100_2.5 R113_2.1 | length 12.2
  Top w0.152: IC100_2.5@66.67,17.542 65.34,17.542 65.015,17.217 65.015,14.794 65.544,14.264 67.799,14.264 68.666,13.397 68.666,11.947 67.972,11.253 C109_2.2@67.872,11.253
  Top w0.254: R113_2.1@67.872,9.98 C109_2.2@67.872,11.253
NetC110_1_2: C110_1.2 IC100_1.6 R114_1.1 | length 11.9
  Top w0.152: C110_1.2@94.86,11.253 94.96,11.253 95.653,11.947 95.653,13.693 95.336,14.01 94.014,14.01 93.399,14.625 93.399,17.82 93.771,18.192 IC100_1.6@95.245,18.192
  Top w0.254: R114_1.1@94.86,9.98 C110_1.2@94.86,11.253